# Altium PCB PCB1.PcbDoc
Units mm, origin at the board's own origin, x right, y up, seen from the top; angles counter-clockwise.
Board outline 58.3 x 46.5 mm, 2 copper layers (Top Layer, Bottom Layer); 6 components, 8 nets, 22 pads, 0 vias.
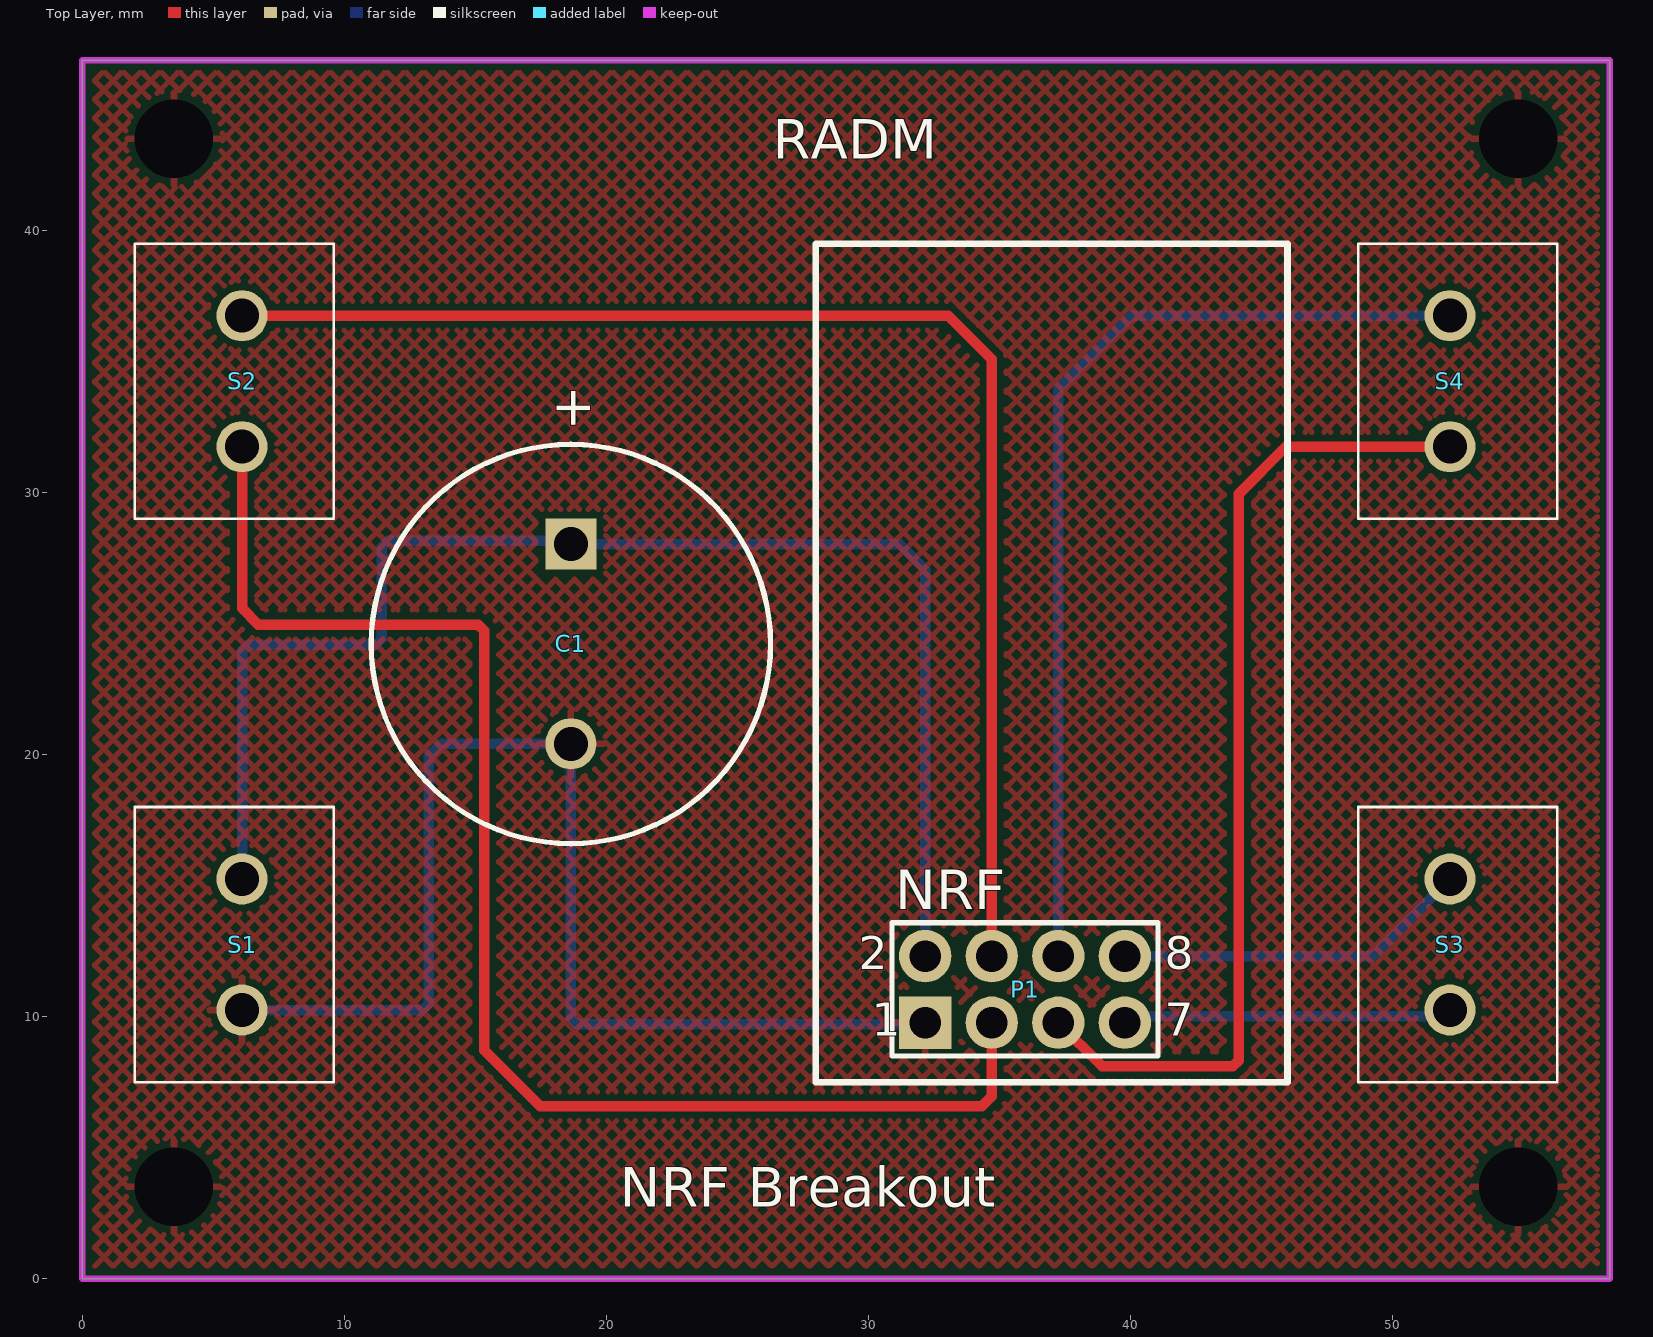
[diagram p0: Top Layer view]
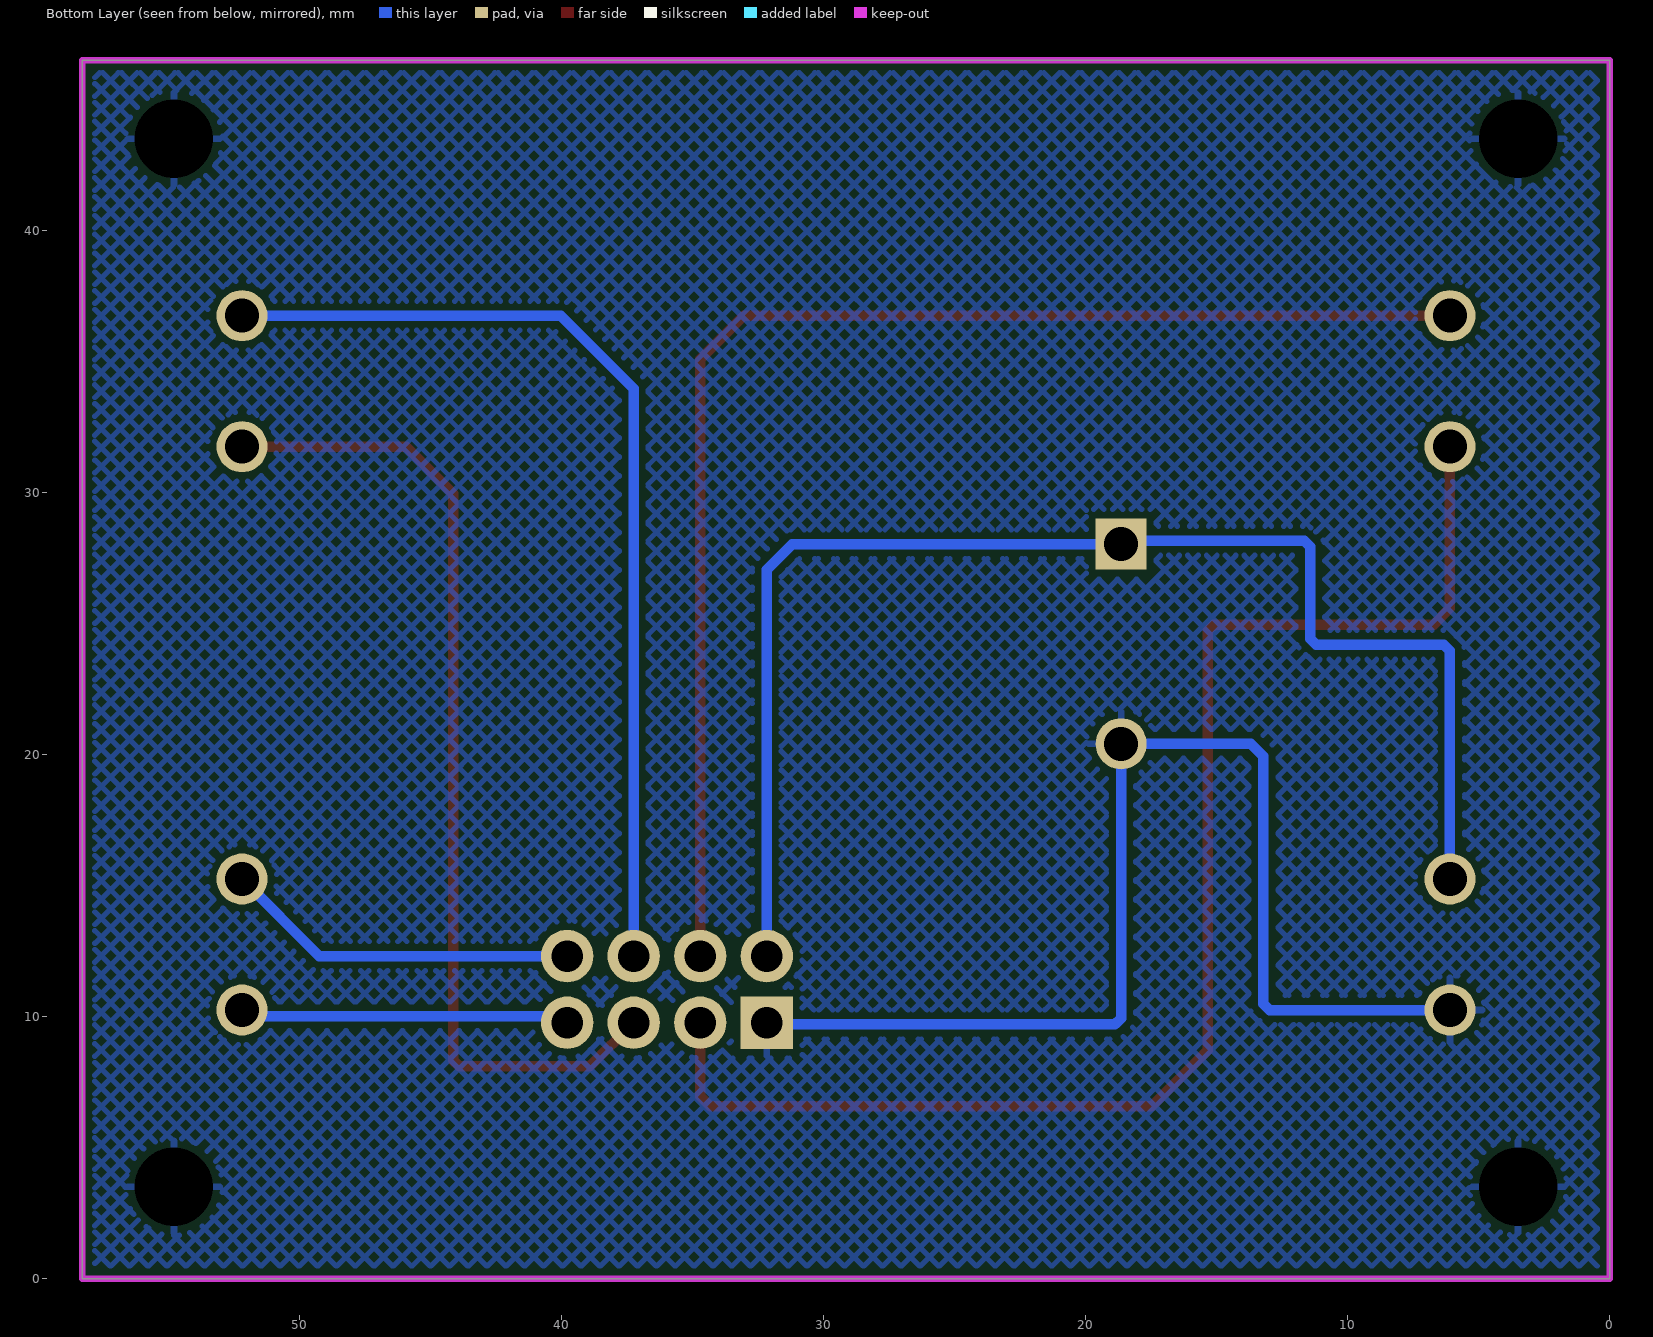
[diagram p1: Bottom Layer view, seen from below]
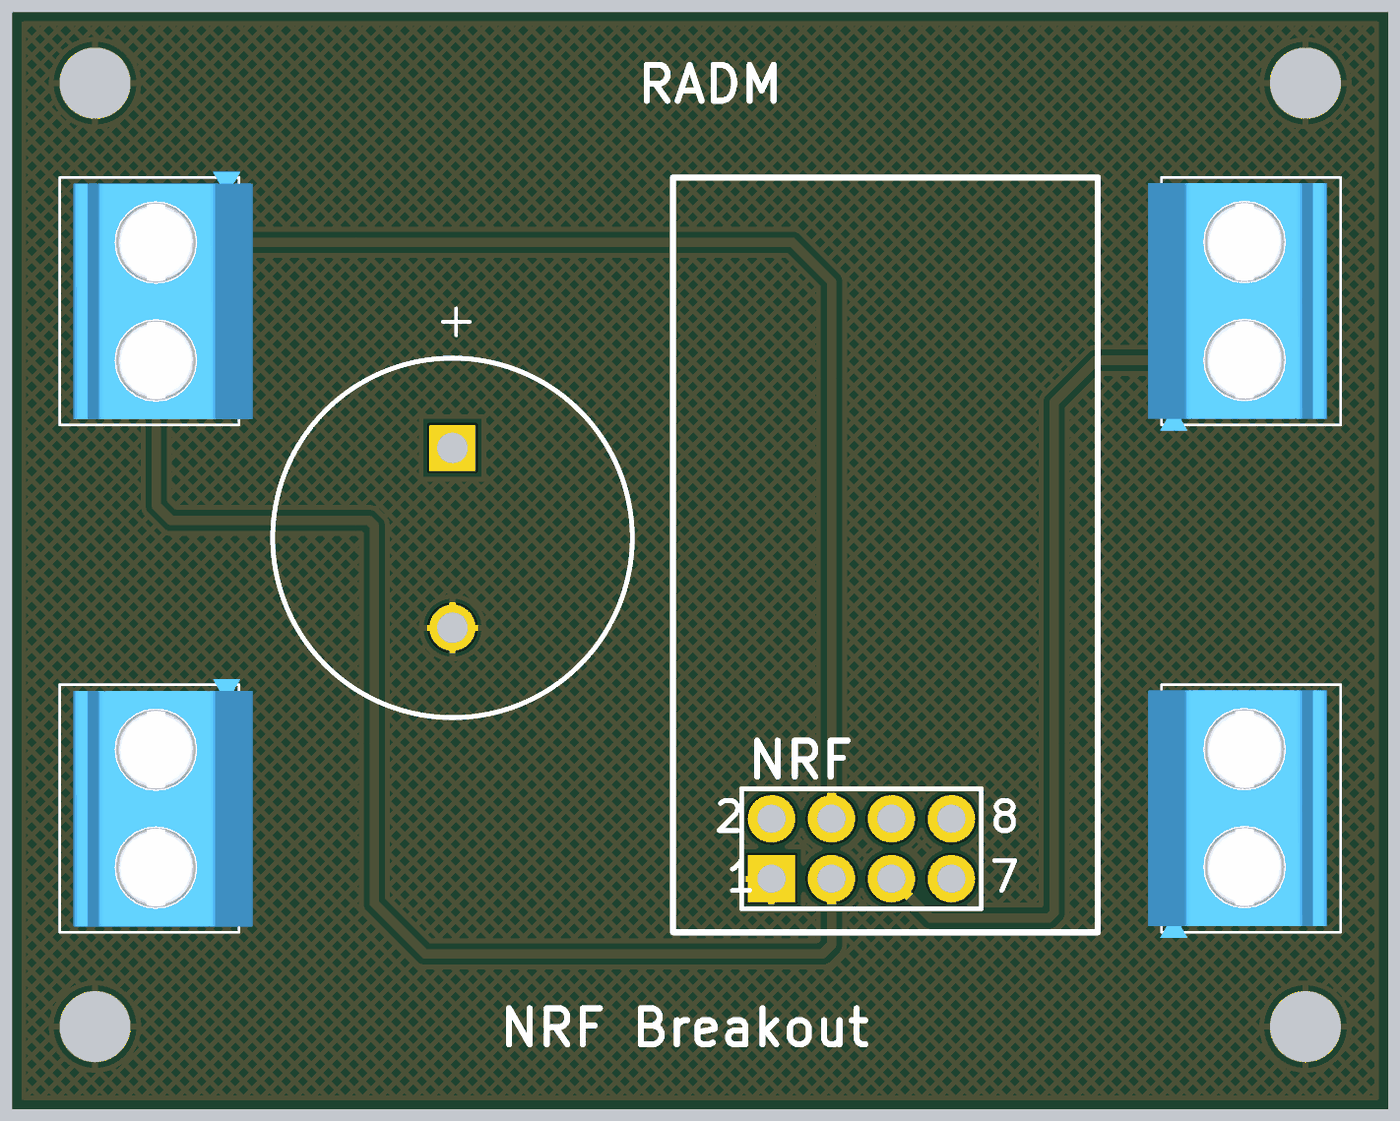
[diagram p2: 3D render of the assembled board from above, using the file's embedded part models]

## Layer stack, top to bottom
Top Solder: solder mask 0.0102, Solder Resist, Dk 3.5
Top Layer: signal copper 0.0356
Dielectric 1: dielectric 0.32, FR-4, Dk 4.8
Bottom Layer: signal copper 0.0356
Bottom Solder: solder mask 0.0102, Solder Resist, Dk 3.5

## Board outline
0,0 0,46.5 58.3,46.5 58.3,0

## Design rules (kind name [scope] priority, off if disabled: settings)
Clearance [All] p1: gap=0.254 ignorepadtopadclearanceinfootprint=FALSE except(0: Arc-Hole Track-Hole SMDPad-Hole THPad-Hole Via-Hole Fill-Hole Poly-Hole Region-Hole Text-Hole)
PolygonConnect [All] p1: connectstyle=Relief reliefconductorwidth=0.254 reliefentries=4 polygonreliefangle="90 Angle" airgapwidth=0.254
RoutingVias [All] p1: holewidth=0.711 width=1.27 viastyle="Through Hole" minholewidth=0.711 minwidth=1.27 maxholewidth=0.711 maxwidth=1.27
SolderMaskExpansion [All] p1: expansion=0.102 istentingtop=FALSE
Width [All] p1: maxlimit=0.4 minlimit=0.4 preferedwidth=0.4
30 further rules are at their usual default settings.

## Components (designator, comment, footprint, x,y, rotation, side; value= is the part's Value field where it differs from the comment)
C1 "Cap" RB7.6-15 18.65,24.22 r90 top value=10uF
P1 "Header 4X2" HDR2X4 32.172,9.77 r0 top
S1 "" TB00250002BE 6.1,10.25 r90 top
S2 "" TB00250002BE 6.1,31.75 r90 top
S3 "" TB00250002BE 52.2,15.25 r270 top
S4 "" TB00250002BE 52.2,36.75 r270 top

## Footprints (in the part's own frame and the unit in brackets; to place one, negate y for a bottom-side part, rotate by r counter-clockwise, add the part's x,y. Pads: shape width x height; smd on the part's side, far side on the other; paste and mask are expansions set on the pad)
HDR2X4 [mm] "Connector; Header; 4x2 Position"
  rect 2x2 hole 1.2: 1(0,0)
  round 2 hole 1.2: 2(0,2.54) 3(2.54,0) 4(2.54,2.54) 5(5.08,0) 6(5.08,2.54) 7(7.62,0) 8(7.62,2.54)
  silkscreen extent -1.27,-1.27 8.89,3.81
RB7.6-15 [mm] "Polarized Capacitor (Radial); 2 Leads"
  rect 1.95x1.95 hole 1.3: 1(3.81,0)
  round 1.95 hole 1.3: 2(-3.81,0)
  silkscreen extent -7.62,-7.62 7.62,7.62
TB00250002BE [mm]
  round 1.95 hole 1.3: 1(0,0) 2(5,0)
  silkscreen extent -2.75,-3.5 7.75,4.1, body extent -2.51,-4.08 7.99,3.52, height 9.99

## Part data
C1: library part "Cap Pol1", "Polarized Capacitor (Radial)", LatestRevisionDate=17-Jul-2002, LatestRevisionNote="Re-released for DXP Platform.", PackageDescription="Polarized Capacitor (Radial); 2 Leads", PackageReference=RB7.6-15, Published=8-Jun-2000, Publisher="Altium Limited"
P1: "Header, 4-Pin, Dual row", LatestRevisionDate=17-Jul-2002, LatestRevisionNote="Re-released for DXP Platform.", Publisher="Altium Limited"
S1 S2 S3 S4: library part TB002-500-02BE, "Connector", Manufacturer_Name="CUI Devices", Mouser Part Number=490-TB002-500-02BE, Arrow Part Number=TB002-500-02BE, Arrow Price/Stock=https://www.arrow.com/en/products/tb002-500-02be/cui-devices?region=nac, Datasheet Link=https://eu.mouser.com/datasheet/2/670/tb002_500-1550579.pdf, Height=10.4mm, Manufacturer_Part_Number=TB002-500-02BE, Mouser Price/Stock=https://www.mouser.co.uk/ProductDetail/CUI-Devices/TB002-500-02BE?qs=vLWxofP3U2x9716kcgva%2Fw%3D%3D

## Free pads (board coordinates)
  round 1.524 hole 3: 1(3.5,3.5) 2(3.5,43.5) 3(54.8,3.5) 4(54.8,43.5)

## Nets (pads, with @x,y where several pads share a name; then routed paths per layer and width w, separated by ;. In a path a pad name is that pad's centre, name@x,y a point inside that pad or via, vN(x,y) a via of type N, cw(c..) or ccw(c..) an arc to the next point about the centre after c; other vN are vias at no path point)
+3V3: C1.1 P1.2 S1.2 | length 54
  Bottom Layer w0.4: S1.2 6.1,23.956 6.334,24.19 11.196,24.19 11.43,24.424 11.43,27.926 11.664,28.16 18.52,28.16 C1.1 31.196,28.03 32.172,27.054 P1.2 P1.2@32.022,12.16
CE: P1.3 S2.1 | length 55
  Top Layer w0.4: S2.1 6.1,25.58 6.72,24.96 15.106,24.96 15.34,24.726 15.34,8.72 17.48,6.58 34.33,6.58 34.712,6.962 P1.3
CSN: P1.4 S2.2 | length 52.1
  Top Layer w0.4: S2.2 33.05,36.75 34.712,35.088 P1.4
GND: C1.2 P1.1 pad.1 pad.2 pad.3 pad.4 S1.1 | length 47.1
  Bottom Layer w0.4: S1.1 12.986,10.25 13.22,10.484 13.22,19.936 13.694,20.41 C1.2 18.65,9.934 18.884,9.7 32.102,9.7 P1.1 P1.1@31.692,10.25
IRQ: P1.8 S3.1 | length 13.6
  Bottom Layer w0.4: P1.8 49.26,12.31 S3.1
MISO: P1.7 S3.2 | length 12.6
  Bottom Layer w0.4: P1.7 40.032,10.01 51.96,10.01 S3.2
MOSI: P1.6 S4.1 | length 37.8
  Bottom Layer w0.4: P1.6 37.252,33.966 40.036,36.75 S4.1
SCK: P1.5 S4.2 | length 38.1
  Top Layer w0.4: P1.5 38.926,8.096 43.914,8.096 44.148,8.33 44.148,29.96 45.938,31.75 S4.2

## Polygon pours and split planes (outlines as drawn)
GND on Top Layer "GND_L01_P004" (hatched 45Degree grid 0.508 track 0.203, pour order 4): 0,0 58.3,0 58.3,46.5 0,46.5
GND on Bottom Layer "GND_L02_P005" (hatched 45Degree grid 0.508 track 0.203, pour order 5): 0,0 58.3,0 58.3,46.5 0,46.5

## Keep-outs
Keep-Out Layer:
  the board outline again, w0.254

## Silkscreen, mask and mechanical layers (free items; w line width, h text height)
Top Overlay:
  lines w0.254: 28,7.5 28,39.5 46,39.5 46,7.5 28,7.5
  text "RADM" at 26.357,42.738 h1.52
  text "NRF" at 31.029,14.088 h1.52
  text "NRF Breakout" at 20.517,2.738 h1.52

## Text inside footprints (layer, text, board x,y; h text height)
C1: Top Overlay "+" at 19.387,32.352 h1.5 r90
P1: Top Overlay "2" at 29.632,11.802 h1.27; Top Overlay "1" at 30.14,9.262 h1.27; Top Overlay "7" at 41.316,9.262 h1.27; Top Overlay "8" at 41.316,11.802 h1.27